# Altium PCB MilledPCB.PcbDoc
Units mil, origin at the board's own origin, x right, y up, seen from the top; angles counter-clockwise.
Board outline 3275 x 3715 mil, 2 copper layers (Top Layer, Bottom Layer); 58 components, 34 nets, 243 pads, 6 vias.
Unrouted connection lines stored in the file: 2.
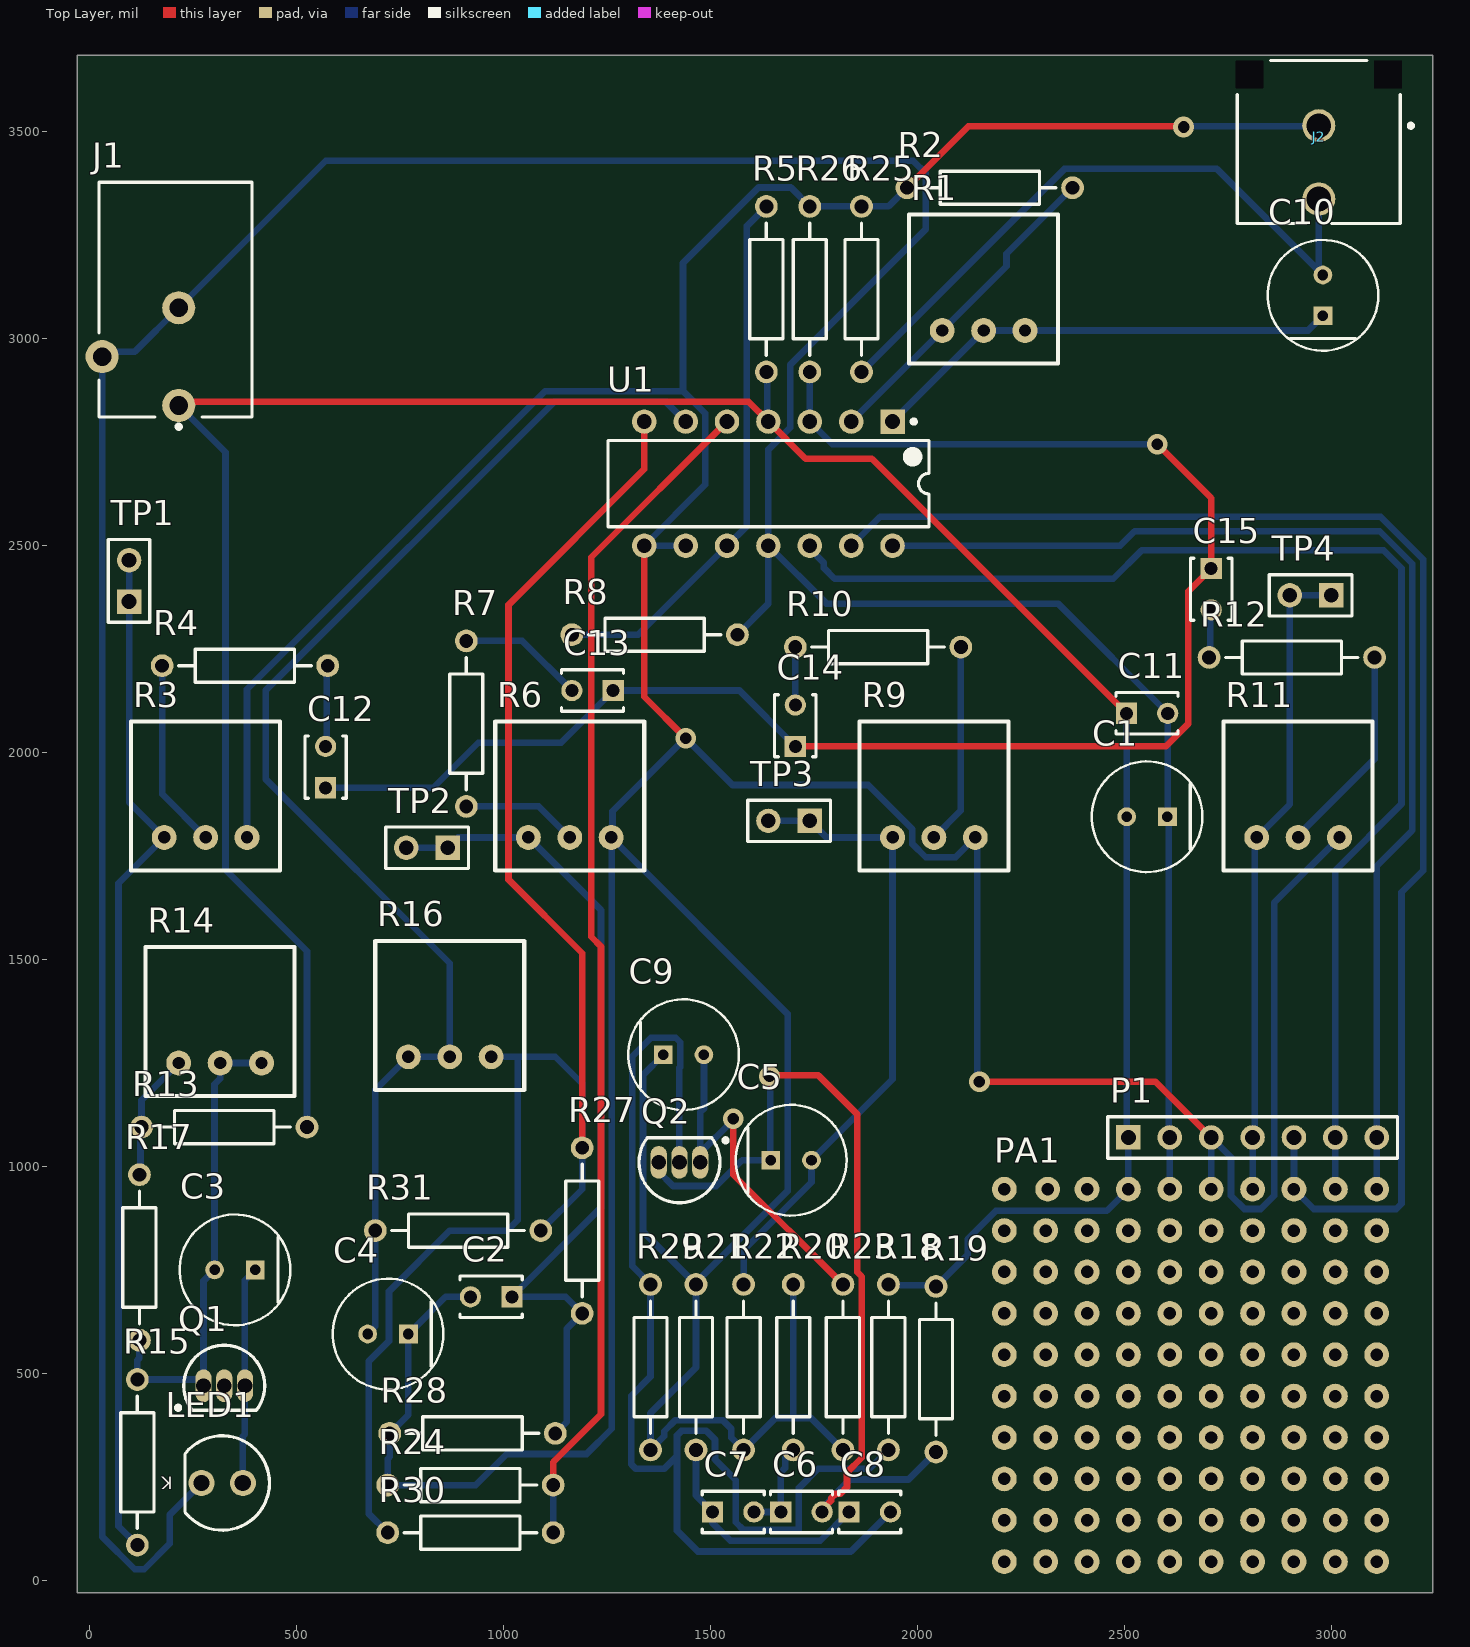
[diagram p0: Top Layer view]
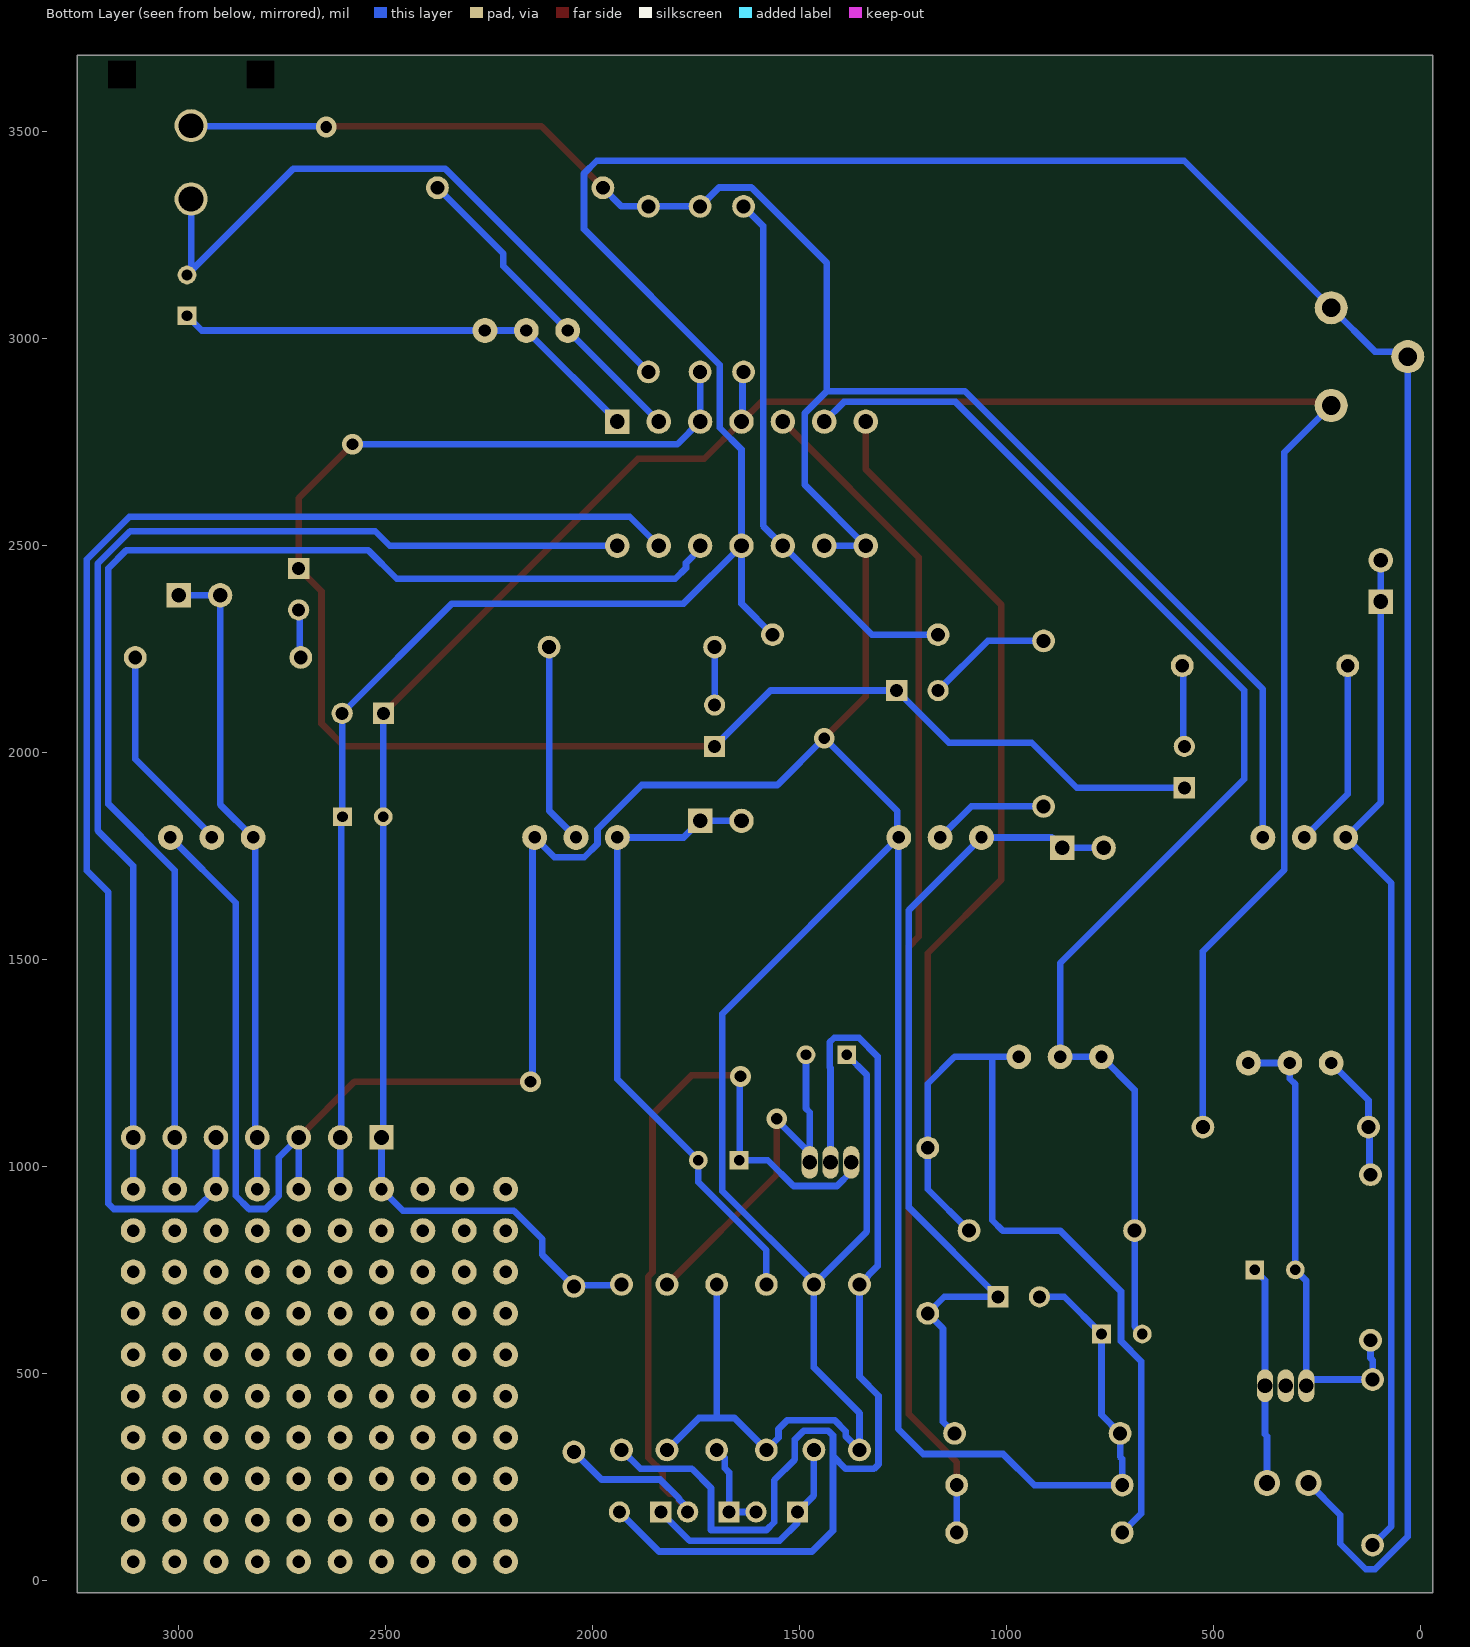
[diagram p1: Bottom Layer view, seen from below]

## Layer stack, top to bottom
Top Solder: solder mask 0.4, Solder Resist, Dk 3.5
Top Layer: signal copper 1.4
Dielectric 1: dielectric 12.6, FR-4, Dk 4.8
Bottom Layer: signal copper 1.4
Bottom Solder: solder mask 0.4, Solder Resist, Dk 3.5

## Board outline
-30,-30 3245,-30 3245,3685 -30,3685

## Design rules (kind name [scope] priority, off if disabled: settings)
Clearance [All] p1: gap=10 ignorepadtopadclearanceinfootprint=FALSE except(0: Arc-Hole Track-Hole SMDPad-Hole THPad-Hole Via-Hole Fill-Hole Poly-Hole Region-Hole Text-Hole)
PolygonConnect [All] p1: connectstyle=Relief reliefconductorwidth=10 reliefentries=4 polygonreliefangle="90 Angle" airgapwidth=10
RoomDefinition OscMotherboard [InComponentClass('OscMotherboard')] p1: confinementstyle=ConfineIn formatcopy=TRUE lockcomponents=FALSE outline -45,1675 3505,1675 3505,4205 -45,4205
RoomDefinition ToneDroneOsc [InComponentClass('ToneDroneOsc')] p2: confinementstyle=ConfineIn formatcopy=TRUE lockcomponents=FALSE outline 0,0 595,0 595,1665 0,1665
RoomDefinition PerfBoard [InComponentClass('PerfBoard')] p3: confinementstyle=ConfineIn formatcopy=TRUE lockcomponents=FALSE outline 2170,5 3225,5 3225,1610 2170,1610
RoomDefinition BjtPhaseShiftOsc [InComponentClass('BjtPhaseShiftOsc')] p4: confinementstyle=ConfineIn formatcopy=TRUE lockcomponents=FALSE outline 1265,5 2160,5 2160,1770 1265,1770
RoomDefinition AstableMultivibrator [InComponentClass('AstableMultivibrator')] p5: confinementstyle=ConfineIn formatcopy=TRUE lockcomponents=FALSE outline 540,0 1265,0 1265,1660 540,1660
RoutingVias [All] p1: holewidth=28 width=50 viastyle="Through Hole" minholewidth=28 minwidth=50 maxholewidth=28 maxwidth=50
SolderMaskExpansion [All] p1: expansion=4 istentingtop=FALSE
Width [All] p1: maxlimit=20 minlimit=10 preferedwidth=16 minimp=50.000000 maximp=50.000000 favimp=50.000000
30 further rules are at their usual default settings.

## Classes and differential pairs
component class ToneDroneOsc: C3 LED1 Q1 R13 R14 R15 R17
component class PerfBoard: P1 PA1
component class OscMotherboard: C1 C10 C11 C12 C13 C14 C15 J1 J2 R1 R2 R3 R4 R5 R6 R7 R8 R9 R10 R11 R12 R25 R26 TP1 TP2 TP3 TP4 U1
component class BjtPhaseShiftOsc: C5 C6 C7 C8 C9 Q2 R18 R19 R20 R21 R22 R23 R29
component class AstableMultivibrator: C2 C4 R16 R24 R27 R28 R30 R31

## Components (designator, comment, footprint, x,y, rotation, side; value= is the part's Value field where it differs from the comment)
C1 "10uF" FP-ESLE3-MFG 2555,1845 r180 top
C2 "0.01uF" KEMT-C315-THT-2 970,685 r180 top
C3 "10uF" FP-ESLE3-MFG 350.79,750 r180 top
C4 "1uF" FP-ESLE3-MFG 720.79,595 r180 top value=10uF
C5 "1uF" FP-ESLE3-MFG 1695,1015 r0 top value=10uF
C6 "0.1uF" KEMT-C315-THT-2 1720,165 r0 top
C7 "0.1uF" KEMT-C315-THT-2 1555,165 r0 top
C8 "0.1uF" KEMT-C315-THT-2 1885,165 r0 top
C9 "47uF" FP-ESLE3-MFG 1435,1270 r0 top value=10uF
C10 "1uF" FP-ESLE3-MFG 2980,3105 r90 top value=10uF
C11 "0.01uF" KEMT-C315-THT-2 2555,2095 r0 top
C12 "0.1uF" KEMT-C315-THT-2 570,1965 r90 top
C13 "0.1uF" KEMT-C315-THT-2 1215,2150 r180 top
C14 "0.01uF" KEMT-C315-THT-2 1705,2065 r90 top
C15 "0.1uF" KEMT-C315-THT-2 2710,2395 r270 top
J1 "PJ-102B" CUI-PJ-102B_V 215,2956.89 r90 top
J2 "RCA Conn" CUI-RCJ-041_V 2970,3515 r180 top
LED1 "5mm Red" "Type 5mm" 320,235 r180 top
P1 "OSC4 Connector" HDR1X7 2510,1070 r0 top
PA1 "ProtoArea" ProtoArea 2210,945 r0 top
Q1 "2N3904" TO-92A 325,470 r270 top
Q2 "2N3904" TO-92A 1425,1010 r90 top
R1 "50K" TrimmerPot 2060,3020 r0 top
R2 "10K" AXIAL-0.4 2175,3365 r180 top value=1K
R3 "50K" TrimmerPot 180,1795 r0 top
R4 "100K" AXIAL-0.4 375,2210 r180 top value=1K
R5 "10K" AXIAL-0.4 1635,3120 r90 top value=1K
R6 "50K" TrimmerPot 1060,1795 r0 top
R7 "100K" AXIAL-0.4 910,2070 r270 top value=1K
R8 "10K" AXIAL-0.4 1365,2285 r0 top value=1K
R9 "50K" TrimmerPot 1940,1795 r0 top
R10 "100K" AXIAL-0.4 1905,2255 r0 top value=1K
R11 "50K" TrimmerPot 2820,1795 r0 top
R12 "100K" AXIAL-0.4 2905,2230 r0 top value=1K
R13 "1K" AXIAL-0.4 325,1095 r0 top
R14 "50K" TrimmerPot 215,1250 r0 top
R15 "100K" AXIAL-0.4 115,285 r90 top
R16 "50K" TrimmerPot 770,1265 r0 top
R17 "3K" AXIAL-0.4 120,780 r90 top value=1K
R18 "64K" AXIAL-0.4 1930,515 r90 top
R19 "1K" AXIAL-0.4 2045,510 r270 top
R20 "10K" AXIAL-0.4 1700,515 r90 top
R21 "10K" AXIAL-0.4 1465,515 r90 top
R22 "1Meg" AXIAL-0.4 1580,515 r270 top
R23 "680" AXIAL-0.4 1820,515 r270 top
R24 "47K" AXIAL-0.4 920,230 r0 top value=1K
R25 "47K" AXIAL-0.4 1865,3120 r90 top value=1K
R26 "1Meg" AXIAL-0.4 1740,3120 r90 top value=1K
R27 "22K" AXIAL-0.4 1190,845 r270 top value=1K
R28 "10K" AXIAL-0.4 925,355 r180 top value=1K
R29 "10K" AXIAL-0.4 1355,515 r270 top
R30 "47K" AXIAL-0.4 920,115 r0 top value=1K
R31 "47K" AXIAL-0.4 890,845 r180 top value=1K
TP1 "Test Point" HDR1X2 95,2365 r90 top
TP2 "Test Point" HDR1X2 865,1770 r180 top
TP3 "Test Point" HDR1X2 1740,1835 r180 top
TP4 "Test Point" HDR1X2 3000,2380 r180 top
U1 "LM324N" N0014A 1640,2650 r270 top

## Footprints (in the part's own frame and the unit in brackets; to place one, negate y for a bottom-side part, rotate by r counter-clockwise, add the part's x,y. Pads: shape width x height; smd on the part's side, far side on the other; paste and mask are expansions set on the pad)
AXIAL-0.4 [mm] "Axial Device, Thru-Hole; 2 Leads; 0.4 in Pin Spacing"
  round 1.4 hole 0.85: 1(-5.08,0) 2(5.08,0)
  silkscreen extent -4.06,-1.02 4.06,1.02
CUI-PJ-102B_V [mil] "THD, 3-Leads, Body 14.4x9mm, Height 11mm"
  round 80 hole 45: 1(-118.11,0) 2(118.11,0) 3(0,185.04)
  silkscreen extent -174,-177 421,193, body extent -146,-177 421,193, height 433
CUI-RCJ-041_V [mm] "Jack, 2-Leads, Body 19.5x10mm"
  round 2.032 hole 1.524: 1(0,0) 2(0,4.5)
  round 0 hole 1.7 square unplated: MH1(-4.25,-3.15) MH2(4.25,-3.15)
  silkscreen extent -5.77,-4 5,6, body extent -5,-13.5 5,6, height 11.51
FP-ESLE3-MFG [mm]
  rect 1.15x1.15 hole 0.65 paste-1000 mask+0: 1(-1.25,0)
  round 1.15 hole 0.65 paste-1000 mask+0: 2(1.25,0)
  silkscreen extent -3.4,-3.4 3.4,3.4, body extent -3.5,-3.5 3.5,3.5, height 0.25
HDR1X2 [mm] "Connector; Header; 2 Position"
  rect 1.5x1.5 hole 0.9: 1(0,0)
  round 1.5 hole 0.9: 2(2.54,0)
  silkscreen extent -1.27,-1.27 3.81,1.27
HDR1X7 [mm] "Connector; Header; 7 Position"
  rect 1.5x1.5 hole 0.9: 1(0,0)
  round 1.5 hole 0.9: 2(2.54,0) 3(5.08,0) 4(7.62,0) 5(10.16,0) 6(12.7,0) 7(15.24,0)
  silkscreen extent -1.27,-1.27 16.51,1.27
KEMT-C315-THT-2 [mm] "THD, 2-Leads, Body 3.81x2.54mm"
  rect 1.3x1.3 hole 0.8: 1(-1.27,0)
  round 1.3 hole 0.8: 2(1.27,0)
  silkscreen extent -1.91,-1.27 1.91,1.27, body extent -1.91,-1.27 1.91,1.27, height 4.66
N0014A [mm] "DIP, 14-Leads, Body 19.7x6.6mm, Pitch 2.54mm"
  rect 1.5x1.5 hole 0.9: 1(-3.81,7.62)
  round 1.5 hole 0.9: 2(-3.81,5.08) 3(-3.81,2.54) 4(-3.81,0) 5(-3.81,-2.54) 6(-3.81,-5.08) 7(-3.81,-7.62) 8(3.81,-7.62) 9(3.81,-5.08) 10(3.81,-2.54) 11(3.81,0) 12(3.81,2.54) 13(3.81,5.08) 14(3.81,7.62)
  silkscreen extent -3.93,-9.85 2.65,9.85, body extent -3.95,-9.85 3.95,9.85, height 5.08
ProtoArea [mil]
  round 60 hole 30: 1(0,0) 2(105,0) 3(200,0) 4(300,0) 5(400,0) 6(500,0) 7(600,0) 8(700,0) 9(800,0) 10(900,0) 11(0,-100) 12(100,-100) 13(200,-100) 14(300,-100) 15(400,-100) 16(500,-100) 17(600,-100) 18(700,-100) 19(800,-100) 20(900,-100) 21(0,-200) 22(100,-200) 23(200,-200) 24(300,-200) 25(400,-200) 26(500,-200) 27(600,-200) 28(700,-200) 29(800,-200) 30(900,-200) 31(0,-300) 32(100,-300) 33(200,-300) 34(300,-300) 35(400,-300) 36(500,-300) 37(600,-300) 38(700,-300) 39(800,-300) 40(900,-300) 41(0,-400) 42(100,-400) 43(200,-400) 44(300,-400) 45(400,-400) 46(500,-400) 47(600,-400) 48(700,-400) 49(800,-400) 50(900,-400) 51(0,-500) 52(100,-500) 53(200,-500) 54(300,-500) 55(400,-500) 56(500,-500) 57(600,-500) 58(700,-500) 59(800,-500) 60(900,-500) 61(0,-600) 62(100,-600) 63(200,-600) 64(300,-600) 65(400,-600) 66(500,-600) 67(600,-600) 68(700,-600) 69(800,-600) 70(900,-600) 71(0,-700) 72(100,-700) 73(200,-700) 74(300,-700) 75(400,-700) 76(500,-700) 77(600,-700) 78(700,-700) 79(800,-700) 80(900,-700) 81(0,-800) 82(100,-800) 83(200,-800) 84(300,-800) 85(400,-800) 86(500,-800) 87(600,-800) 88(700,-800) 89(800,-800) 90(900,-800) 91(0,-900) 92(100,-900) 93(200,-900) 94(300,-900) 95(400,-900) 96(500,-900) 97(600,-900) 98(700,-900) 99(800,-900) 100(900,-900)
TO-92A [mm] "TO, Flat Index; 3 In-Line, Axial Leads; Body Dia. 4.5mm; Leads 0.51 x 0.48 mm (max)"
  oval 2x1 hole 0.9: 1(0,-1.27) 2(0,0) 3(0,1.27)
  silkscreen extent -2.48,-2.95 1.5,2.48, body extent -2.48,-2.5 1.5,2.5, height 6.86
TrimmerPot [mil]
  round 60 hole 30: 1(0,0) 2(100,0) 3(200,0)
  silkscreen extent -80,-80 280,280
"Type 5mm" [mm] "THT, LED-5mm, 2pin- Body 5.8mm"
  round 1.6 hole 1: 1(1.27,0) 2(-1.27,0)
  silkscreen extent -2.9,-2.9 2.29,2.9, body extent -2.9,-2.9 2.5,2.9, height 11.7

## Part data
C1 C3: library part CMP-03015-000004-1, "CAP ALUM 10UF 20% 100V THRU HOLE", Leakage Current=10uA, Manufacturer=kemet, Manufacturer Part Number=ESL106M100AE3AA, Package=ESLE3, Ripple Current=280mA, Temperature="-40°C to +105°C", Temperature Range High=+105°C, Temperature Range Low=-40°C, Tolerance=20%, Voltage Rating=100V, Automotive=No, Capacitance=10uF, Category=Cap, ComponentLink2Description=Datasheet, ComponentLink2URL=https://content.kemet.com/datasheets/KEM_A4074_ESL.pdf, Device Class L1="Passive Components", Device Class L2=Capacitors, Device Class L3="Aluminum Electrolytic Capacitors", Digikey Description="CAP ALUM 10UF 20% 100V THRU HOLE", Dissipation Factor=9%, Esr=0.68Ω, Height=12.5mm, Lead Free=Yes, Life=10000Hours, Material=Aluminum, Mouser Description="Cap, 10UF, 100V, Alu Elec, Radial", Octopart=https://octopart.com/esl106m100ae3aa-kemet-84758885, RoHS=TRUE
C2 C6 C7 C8 C11 C12 C13 C14 C15: library part CMP-1664-00007-1, "Capacitor, Ceramic, 0.01 uF, +/- 10%, 100 V, X7R, -55 to 125 degC, 2-Pin THD, RoHS, Bulk", Case\Package=PDIP, Forward Current="60 mA", Forward Voltage="1.5 V", Max Operating Temperature="100 degC", Max Power Dissipation="400 mW", Min Operating Temperature="-55 degC", Output Voltage="70 V", Package Quantity=2000, Channels=2, ComponentLink1Description="Manufacturer URL", ComponentLink1URL=http://www.kemet.com/, ComponentLink2Description=Datasheet, ComponentLink2URL=http://capacitoredge.kemet.com/capedge2/DataSheet/Datasheet-C315C103K1R5TA.pdf?pn=C315C103K1R5TA{BULK}, DatasheetVersion=Aug-16, Mount="Through Hole", Nominal Vf="1.3 V", PackageDescription="2-Pin Through Hole Device, Body 3.81 x 2.54 mm", PackageReference=C315-THT-2, Packaging=Rail/Tube, Pins=16, Radiation Hardening=No, REACH SVHC=Unknown, RoHSCompliant=true, Vce Max="500 mV"
C4 C5 C9 C10: library part CMP-03015-000004-1, "CAP ALUM 10UF 20% 100V THRU HOLE", Capacitance=10uF, Leakage Current=10uA, Manufacturer=kemet, Manufacturer Part Number=ESL106M100AE3AA, Package=ESLE3, Ripple Current=280mA, Temperature="-40°C to +105°C", Temperature Range High=+105°C, Temperature Range Low=-40°C, Tolerance=20%, Voltage Rating=100V, Automotive=No, Category=Cap, ComponentLink2Description=Datasheet, ComponentLink2URL=https://content.kemet.com/datasheets/KEM_A4074_ESL.pdf, Device Class L1="Passive Components", Device Class L2=Capacitors, Device Class L3="Aluminum Electrolytic Capacitors", Digikey Description="CAP ALUM 10UF 20% 100V THRU HOLE", Dissipation Factor=9%, Esr=0.68Ω, Height=12.5mm, Lead Free=Yes, Life=10000Hours, Material=Aluminum, Mouser Description="Cap, 10UF, 100V, Alu Elec, Radial", Octopart=https://octopart.com/esl106m100ae3aa-kemet-84758885, RoHS=TRUE
J1: library part CMP-2000-06900-1, "Through Hole Right Angle DC Power Jack, 2.5 A, 2.5 mm Center Pin, 3 Position, -25 to 85 degC, RoHS, Bulk", Current Rating=2.5A, Flammability Rating=UL94V-0, Insulation Resistance=100MOhms, Manufacturer=CUIInc., Operating Temperature Range=-25Cto+85C, Package Description="3-Pin Through Hole Device, Body 14.4 x 9 mm, Height 11 mm", Voltage Rating=24V, Brand=CUI, Connector Type=DCPowerJack, Contact Gender=Male, Contact Material=Copper, Contact Plating=Nickel, Datasheet URL=http://www.cui.com/product/resource/pj-102b.pdf, Datasheet Version="Rev. 1.03, 04/2016", Factory Pack Quantity=280, Housing Material=PolybutyleneTerephthalate(PBT), Inside Contact Diameter=2.5mm, Manufacturer URL=http://www.cui.com/, Mounting Angle=Right, Mounting Style=ThroughHole, Mounting Technology=ThroughHole, Outside Contact Diameter=6.5mm, Package Reference=PJ-102B, Packaging=Bulk, Product=Jacks, Product Category=DCPowerConnectors, RoHS=True, Termination Style=ThroughHole
J2: library part CMP-1692-00002-1, "Female RCJ Jack, 2 Position, Height 11.724 mm, Tail Length 4 mm, RoHS, Bulk", Case\Package=Metal, Colour=Black, Current Rating="500 mA", Max Operating Temperature="85 degC", Min Operating Temperature="-55 degC", Package Quantity=400, Voltage Rating="40 V", ComponentLink1Description="Manufacturer URL", ComponentLink1URL=http://www.cui.com/, ComponentLink2Description=Datasheet, ComponentLink2URL=http://www.cui.com/product/resource/rcj-04x.pdf, Connector Type=HDMI, Contact Material=Copper, Contact Plating=Gold, DatasheetVersion="Rev. B, 02/2012", Gender=Female, Height="6.1 mm", Lead Pitch="0.5 mm", Length="16.2 mm", Mount="Surface Mount", PackageDescription="Female RCJ Jack, 2 Position, Height 11.724 mm, Tail Length 4 mm", PackageReference=RCJ-041, Packaging="Tape and Reel", Pins=19, REACH SVHC="No SVHC", RoHSCompliant=true
LED1: library part CMP-1488-00008-1, "THT LED round mono-color color lens, WL-TMRW, Red", Emitting color=Red, Manufacturer="Wuerth Elektronik", PartNumber=151051RS11000, ComponentLink1Description="Manufacturer URL", ComponentLink1URL=http://www.we-online.com, ComponentLink2Description=Datasheet, ComponentLink2URL=http://katalog.we-online.de/pbs/datasheet/7448042001.pdfhttp://katalog.we-online.de/pbs/datasheet/7448042001.pdfhttp://katalog.we-online.de/pbs/datasheet/7448042001.pdfhttp://katalog.we-online.de/pbs/datasheet/151051RS11000.pdf, PackageReference="Type 5mm"
P1: library part "Header 7", "Header, 7-Pin", LatestRevisionDate=17-Jul-2002, LatestRevisionNote="Re-released for DXP Platform.", Publisher="Altium Limited"
PA1: library part PerfBoard
Q1 Q2: "NPN General Purpose Amplifier", ComponentLink1Description="Manufacturer Link", ComponentLink1URL=http://www.fairchildsemi.com/, ComponentLink2Description=Datasheet, ComponentLink2URL=http://www.fairchildsemi.com/ds/2N%2F2N3904.pdf, DatasheetVersion=1997, LatestRevisionDate=15-Jan-2003, LatestRevisionNote="PCB Footprint 'BCY-W3/D4.7' replaced", PackageDescription="TO, Flat Index; 3 In-Line, Axial Leads; Body Dia. 4.5mm; Leads 0.51 x 0.48 mm (max)", PackageReference=TO-92A, PackageVersion=Sep-1998, Published=8-Jun-2000, Publisher="Altium Limited"
R1 R3 R6 R9 R11 R14 R16: library part TrimmerPot
R2 R4 R5 R7 R8 R10 R12 R13 R15 R17 R18 R19 R20 R21 R22 R23 R24 R25 R26 R27 R28 R29 R30 R31: library part Res2, "Resistor", LatestRevisionDate=17-Jul-2002, LatestRevisionNote="Re-released for DXP Platform.", PackageDescription="Axial Device, Thru-Hole; 2 Leads; 0.4 in Pin Spacing", PackageReference=AXIAL-0.4, Published=8-Jun-2000, Publisher="Altium Limited"
TP1 TP2 TP3 TP4: library part "Header 2", "Header, 2-Pin", LatestRevisionDate=17-Jul-2002, LatestRevisionNote="Re-released for DXP Platform.", Publisher="Altium Limited"
U1: library part CMP-0055-00082-3, "Low Power Quad Operational Amplifier, 14-pin MDIP", Manufacturer="Texas Instruments", Package Reference=N0014A, PackageTopMarking=NSUZXYYTTE#*LM324N, PowerWise=N, Code_JEDEC=MS-001-AA, ComponentLink1Description="Datasheet URL", ComponentLink1URL=http://www.ti.com/general/docs/lit/getliterature.tsp?genericPartNumber=LM324&fileType=pdf, CompType=Amplifiers, PackageDescription="MDIP, .750 x .250 x.130in, 14 Lead, .100in Pitch", PinCount=14, RoHS=N

## Via types
v1: diameter 50, hole 28, Top Layer to Bottom Layer, 6 vias

## Nets (pads, with @x,y where several pads share a name; then routed paths per layer and width w, separated by ;. In a path a pad name is that pad's centre, name@x,y a point inside that pad or via, vN(x,y) a via of type N, cw(c..) or ccw(c..) an arc to the next point about the centre after c; other vN are vias at no path point)
COM: C2.2 C4.1 C9.1 J2.1 P1.3 PA1.6 R2.2 R3.3 R6.3 R9.3 R11.3 R20.2 R21.2 R22.2 R23.2 R24.1 R25.2 R26.2 R28.2 R29.2 U1.8 U1.9 | length 14476.7
  Top Layer w16: U1.8 1340,2135 v1(1440,2035) ; R2.2 2123.49,3513.49 2641.51,3513.49 v1(2643.25,3511.75) ; v1(2150,1205) 2575,1205 P1.3
  Bottom Layer w16: R3.3 380,2152.97 1100.56,2873.53 1433.69,2873.53 ; C2.2 860,685 C4.1 770,400 R28.2 725,298 720,293 R24.1 932.79,230 1007.79,305 1200.63,305 1261.56,365.93 R6.3@1261.56,1793.44 ; C9.1 1337,1221.21 1337,843 R21.2 ; U1.9 U1.8 1487.53,2647.53 1487.53,2819.69 1433.69,2873.53 ; R20.2 1700,392 ; R23.2 1743,392 1700,392 ; R2.2 1930,3320 R25.2 R26.2 1694.44,3365.56 1616.13,3365.56 1433.69,3183.12 1433.69,2873.53 ; R9.3 R9.3@2135,1790 ; v1(2150,1205) 2145,1210 2145,1780 R9.3@2135,1790 ; v1(2643.25,3511.75) 2644.88,3513.37 2968.37,3513.37 J2.1 ; PA1.6 P1.3 2758,1022 2758,929.12 2790.12,897 2829.88,897 2862,929.12 2862,1637 R11.3 ; R6.3@1261.56,1793.44 R6.3 1263.2,1798.2 1263.2,1858.2 v1(1440,2035) 1553.31,1921.69 1881.19,1921.69 1988,1814.88 1988,1779.12 2020.12,1747 2092,1747 R9.3@2135,1790 ; R6.3@1261.56,1793.44 1686.43,1368.57 1686.43,940.61 1465,719.19 R21.2 ; R21.2 1465,514 1355,404 R29.2 1388.32,348.32 1388.32,360 1415.32,387 1529.06,387 1550.55,365.51 1550.55,344.45 R22.2 1657,392 1700,392
GND: C1.1 C11.2 J1.2 J1.3 LED1.1 P1.2 PA1.5 R8.2 U1.11 | length 9039.5
  Bottom Layer w16: LED1.1 193,158 193,88 131.63,26.63 108.94,26.63 29.96,105.61 J1.3 42.21,2969.14 109.14,2969.14 J1.2 570.31,3430.31 1989.69,3430.31 2020.56,3399.44 2020.56,3264.99 1692.47,2936.9 1692.47,2785.26 1640,2732.79 U1.11 ; R8.2 1640,2360 U1.11 ; PA1.5 P1.2 2607.11,1072.89 2607.11,1842.11 C1.1 2604.61,1845.39 2604.61,2094.61 C11.2 2340,2360 1780,2360 U1.11
NetC3_1: C3.1 LED1.2 Q1.3 | length 527.4
  Bottom Layer w16: LED1.2 370,348 375,353 Q1.3 375,725 C3.1
NetC3_2: C3.2 Q1.1 R14.1 R14.2 R15.2 R17.1 | length 1153.6
  Bottom Layer w16: R17.1 120,537 115,532 R15.2 Q1.1@275,485 ; Q1.1 Q1.1@275,485 ; 415,1250 R14.2 315,1212 301.57,1198.57 C3.2 275,723.43 Q1.1@275,485
NetC4_2: C4.2 R16.1 R16.2 R31.2 U1.6 | length 3203.7
  Bottom Layer w16: C4.2 690,613.42 R31.2 690,1185 R16.1 R16.2 870,1490.95 425,1935.95 425,2150 1122.53,2847.53 1392.47,2847.53 U1.6
NetC5_1: C5.1 C6.2 Q2.3 R19.2 | length 2143.6
  Top Layer w16: v1(1642.53,1217.47) 1645.06,1220 1760.8,1220 1855,1125.8 1855,744.43 1865.56,733.87 1865.56,296.13 1830,260.57 1830,225 1813.59,208.59 1801.95,208.59 1791.41,198.05 1791.41,191.96 1770,170.55 C6.2
  Bottom Layer w16: Q2.3 1375,987.02 1409.39,952.63 1514.09,952.63 1576.46,1015 C5.1 1644.16,1016.63 1644.16,1215.84 v1(1642.53,1217.47) ; C6.2 1770,174.52 1790.64,195.16 1790.64,197.28 1836.8,243.44 1978.44,243.44 R19.2
NetC6_1: C6.1 C7.2 R20.1 | length 227.4
  Bottom Layer w16: C7.2 C6.1 1670,260.47 1680.44,270.91 1680.44,295.44 R20.1
NetC7_1: C7.1 C8.1 R21.1 | length 569.8
  Bottom Layer w16: R21.1 1465,205 C7.1 1505,138.44 1548.03,95.41 1765.41,95.41 C8.1
NetC8_2: C8.2 Q2.2 R18.1 R29.1 | length 3229.6
  Bottom Layer w16: Q2.2 1425,1238 1427,1240 1427,1300 1416,1311 1356,1311 1311,1266 1311,759 R29.1 1355,492 1309,446 1309,280 1320,269 1388,269 1419,300 ; R18.1 1884.44,269.44 1760,269.44 1713.59,223.03 1713.59,121.41 1579.59,121.41 1561,140 1561,242 1511,292 1511,340 1490,361 1430,361 1419,350 1419,300 ; C8.2 1839.41,69.41 1469.59,69.41 1419,120 1419,300
NetC9_2: C9.2 Q2.1 R23.1 | length 889.4
  Top Layer w16: v1(1555,1115) 1555,980 R23.1
  Bottom Layer w16: Q2.1 Q2.1@1475,1032.34 ; C9.2 1484.21,1140 1475,1130.79 Q2.1@1475,1032.34 ; v1(1555,1115) 1555,1112.34 Q2.1@1475,1032.34
NetC10_1: C10.1 R1.2 R1.3 U1.1 | length 1146
  Bottom Layer w16: U1.1 R1.2 R1.3 2944.21,3020 C10.1
NetC10_2: C10.2 J2.2 R25.1 | length 1612.1
  Bottom Layer w16: R25.1 2355.56,3410.56 2723.65,3410.56 C10.2 2980,3162.13 2970,3172.13 J2.2
NetC12_1: C12.1 C13.1 C14.1 C15.1 R26.1 U1.3 | length 3995.5
  Top Layer w16: C14.1 2600,2015 2655,2070 2655,2390 C15.1 2710,2615 v1(2580,2745)
  Bottom Layer w16: C12.1 830,1915 938.7,2023.7 1138.7,2023.7 C13.1 1570,2150 C14.1 ; R26.1 U1.3 1795,2745 v1(2580,2745)
NetC12_2: C12.2 R4.1 | length 197.1
  Bottom Layer w16: C12.2 572.5,2017.5 572.5,2207.5 R4.1
NetC13_2: C13.2 R7.1 | length 304.7
  Bottom Layer w16: R7.1 1045,2270 C13.2
NetC14_2: C14.2 R10.1 | length 140
  Bottom Layer w16: C14.2 R10.1
NetC15_2: C15.2 R12.1 | length 117.1
  Bottom Layer w16: R12.1 2707.5,2232.5 2707.5,2342.5 C15.2
NetP1_5: P1.5 PA1.8 U1.13 | length 3442.6
  Bottom Layer w16: U1.13 1910,2570 3119.17,2570 3222,2467.17 3222,1714.58 3170,1662.58 3170,910 3157,897 2958,897 PA1.8 P1.5
NetP1_6: P1.6 PA1.9 U1.12 | length 3088
  Bottom Layer w16: U1.12 1740,2492.54 1774.12,2458.42 1774.12,2445.88 1800,2420 2473.14,2420 2541.73,2488.59 3127.04,2488.59 3170,2445.63 3170,1875.83 3010,1715.83 P1.6 PA1.9
NetP1_7: P1.7 PA1.10 U1.14 | length 2850.1
  Bottom Layer w16: U1.14 2490,2500 2525,2535 3117.4,2535 3196,2456.4 3196,1812.02 3110,1726.02 P1.7 PA1.10
NetR1_1: R1.1 R2.1 U1.2 | length 786.6
  Bottom Layer w16: U1.2 R1.1 2215.32,3175.32 2215.32,3205.32 R2.1
NetR3_2: R3.2 R4.2 | length 458.5
  Bottom Layer w16: R4.2 175,1900 R3.2
NetR5_2: R5.2 R8.1 U1.10 | length 1323.4
  Bottom Layer w16: R8.1 1325,2285 U1.10 1587.88,2547.88 1587.88,3272.88 R5.2
NetR6_2: R6.2 R7.2 | length 281.1
  Bottom Layer w16: R7.2 1085,1870 R6.2
NetR9_2: R9.2 R10.2 | length 486.9
  Bottom Layer w16: R9.2 2105,1860 R10.2
NetR11_2: R11.2 R12.2 | length 511.6
  Bottom Layer w16: R11.2 2920,1799.65 3105,1984.65 R12.2
NetR13_1: R13.1 R14.3 R17.2 | length 309.4
  Bottom Layer w16: R17.2 122.5,982.5 122.5,1092.5 R13.1 125,1160 215,1250
NetR16_3: R16.3 R27.1 R30.1 R31.1 U1.7 | length 4007.6
  Top Layer w16: R27.1 1190,1515 1012,1693 1012,2357 1340,2685 U1.7
  Bottom Layer w16: R30.1 674,161 674,529 723,578 723,698 870,845 1009.07,845 1034,869.93 1034,1265 ; R16.3 1034,1265 ; R31.1 1190,945 R27.1 1190,1200 1125,1265 1034,1265
NetR24_2: R24.2 R30.2 U1.5 | length 2878.5
  Top Layer w16: R24.2 1120,285.57 1235.56,401.13 1235.56,1531.46 1212,1555.02 1212,2472 U1.5
  Bottom Layer w16: R30.2 R24.2
OSC1: R3.1 R15.1 TP1.1 TP1.2 | length 2479.9
  Bottom Layer w16: TP1.2 TP1.1 95,1880 R3.1 69.44,1684.44 69.44,130.56 R15.1
OSC2: C2.1 R6.1 R27.2 R28.1 TP2.1 TP2.2 | length 2080.9
  Bottom Layer w16: TP2.2 TP2.1 890,1795 R6.1 1235.56,1619.44 1235.56,900.56 C2.1 1150,685 R27.2 1153,608 1153,383 R28.1
OSC3: C5.2 R9.1 R22.1 TP3.1 TP3.2 | length 1545.7
  Bottom Layer w16: R22.1 1580,797.42 1744.21,961.63 C5.2 1940,1210.79 R9.1 1780,1795 TP3.1 TP3.2
OSC4: P1.4 PA1.7 R11.1 TP4.1 TP4.2 | length 1572.3
  Bottom Layer w16: PA1.7 P1.4 2815,1075 2815,1790 R11.1 2900,1875 TP4.2 TP4.1
VCC: C1.2 C11.1 J1.1 P1.1 PA1.4 R5.1 R13.2 R18.2 R19.1 U1.4 | length 6453.3
  Top Layer w16: J1.1 223.75,2847.53 1592.47,2847.53 U1.4 1730,2710 1890,2710 C11.1
  Bottom Layer w16: J1.1 328,2725.78 328,1717 525,1520 R13.2 ; R5.1 1637.5,2917.5 1637.5,2802.5 U1.4 ; R18.2 1932.5,712.5 2042.5,712.5 R19.1 2121.3,786.3 2121.3,824.18 2190.12,893 2458,893 PA1.4 P1.1 2505.79,1074.21 C1.2 2505.79,2094.21 C11.1
pads on no net: J2.MH1 J2.MH2 PA1.1 PA1.2 PA1.3 PA1.11 PA1.12 PA1.13 PA1.14 PA1.15 PA1.16 PA1.17 PA1.18 PA1.19 PA1.20 PA1.21 PA1.22 PA1.23 PA1.24 PA1.25 PA1.26 PA1.27 PA1.28 PA1.29 PA1.30 PA1.31 PA1.32 PA1.33 PA1.34 PA1.35 PA1.36 PA1.37 PA1.38 PA1.39 PA1.40 PA1.41 PA1.42 PA1.43 PA1.44 PA1.45 PA1.46 PA1.47 PA1.48 PA1.49 PA1.50 PA1.51 PA1.52 PA1.53 PA1.54 PA1.55 PA1.56 PA1.57 PA1.58 PA1.59 PA1.60 PA1.61 PA1.62 PA1.63 PA1.64 PA1.65 PA1.66 PA1.67 PA1.68 PA1.69 PA1.70 PA1.71 PA1.72 PA1.73 PA1.74 PA1.75 PA1.76 PA1.77 PA1.78 PA1.79 PA1.80 PA1.81 PA1.82 PA1.83 PA1.84 PA1.85 PA1.86 PA1.87 PA1.88 PA1.89 PA1.90 PA1.91 PA1.92 PA1.93 PA1.94 PA1.95 PA1.96 PA1.97 PA1.98 PA1.99 PA1.100 Q1.2

## Silkscreen, mask and mechanical layers (free items; w line width, h text height)
Mechanical 1:
  the board outline again, w10

## Text inside footprints (layer, text, board x,y; h text height)
LED1: Top Overlay "K" at 200,250 h30 r180; Top Courtyard "K" at 200,250 h30 r180